# Altium PCB PowerPCB.PcbDoc
Units mm, origin at the board's own origin, x right, y up, seen from the top; angles counter-clockwise.
Board outline 68.75 x 53 mm, 2 copper layers (Top Layer, Bottom Layer); 12 components, 8 nets, 26 pads, 0 vias.
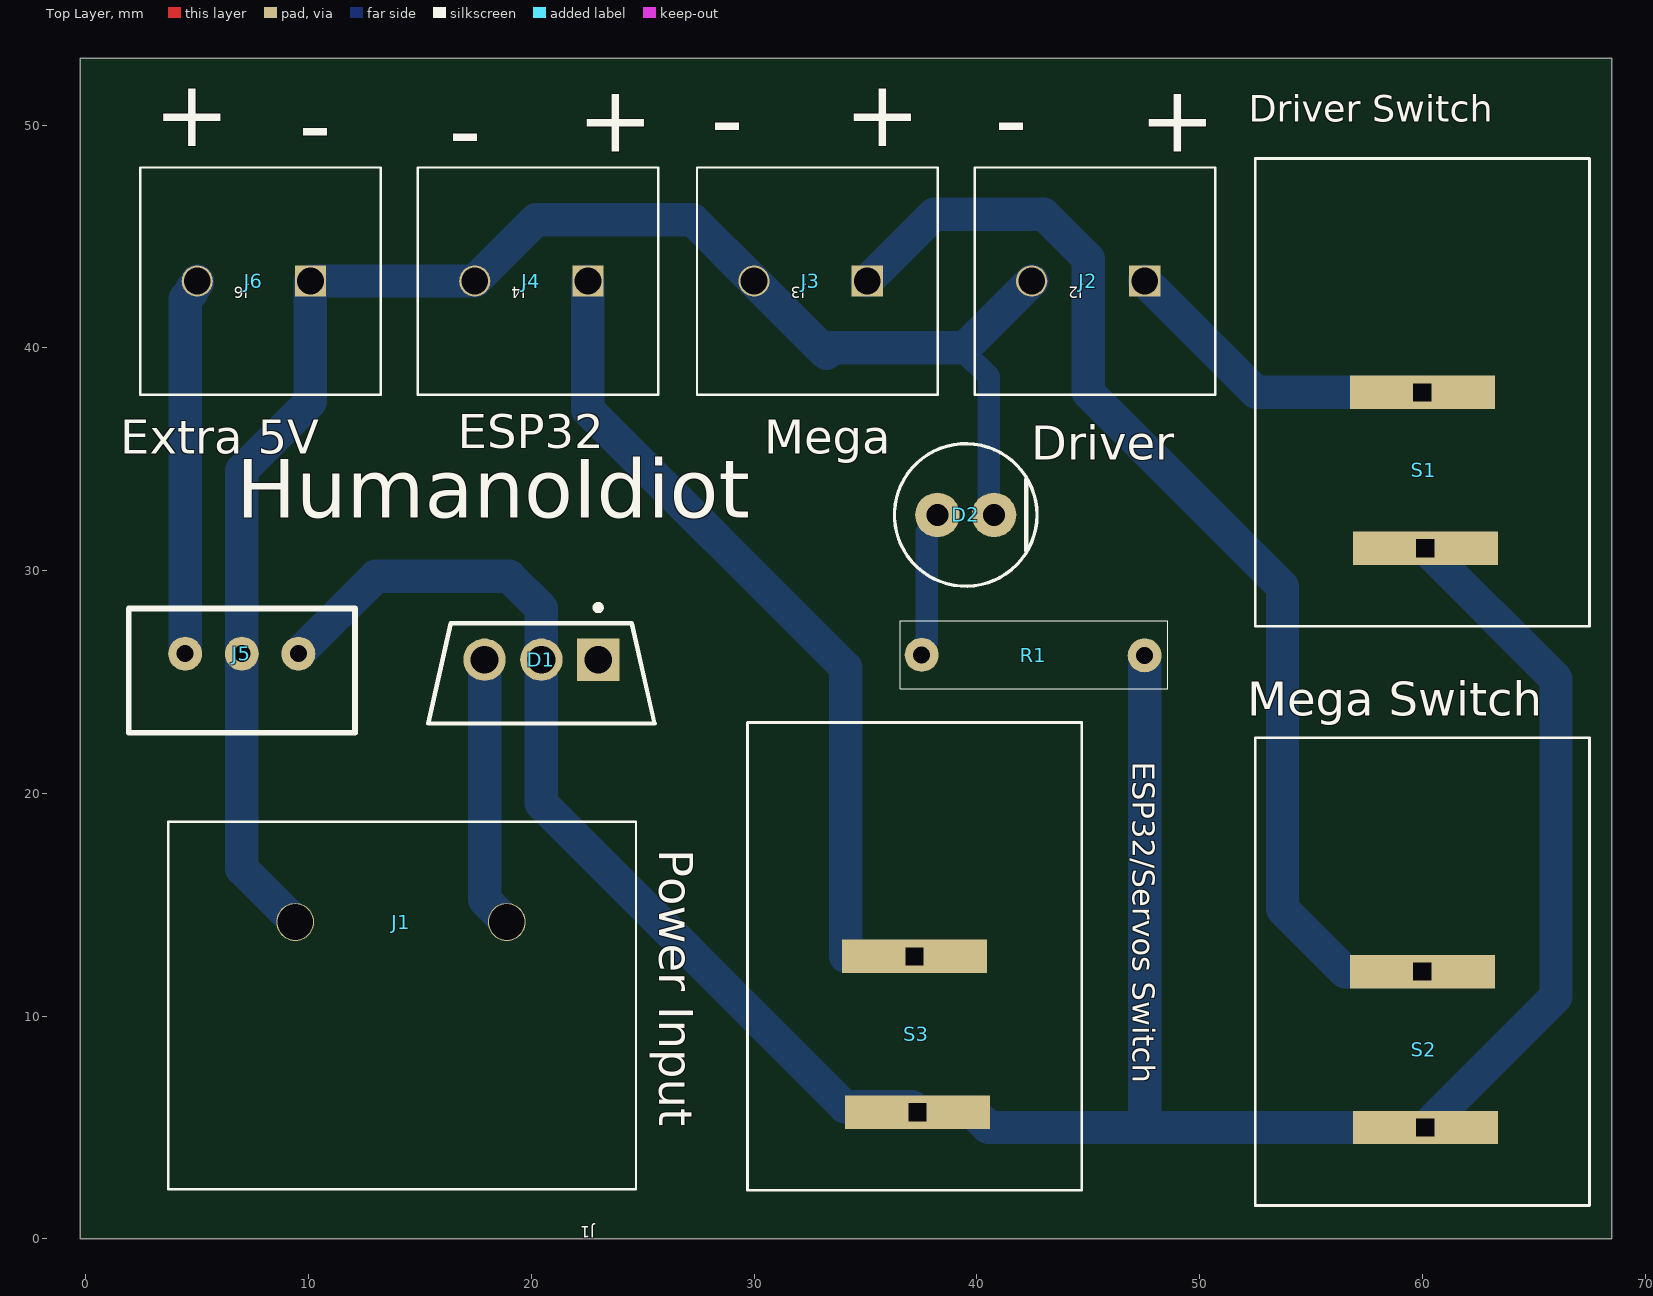
[diagram p0: Top Layer view]
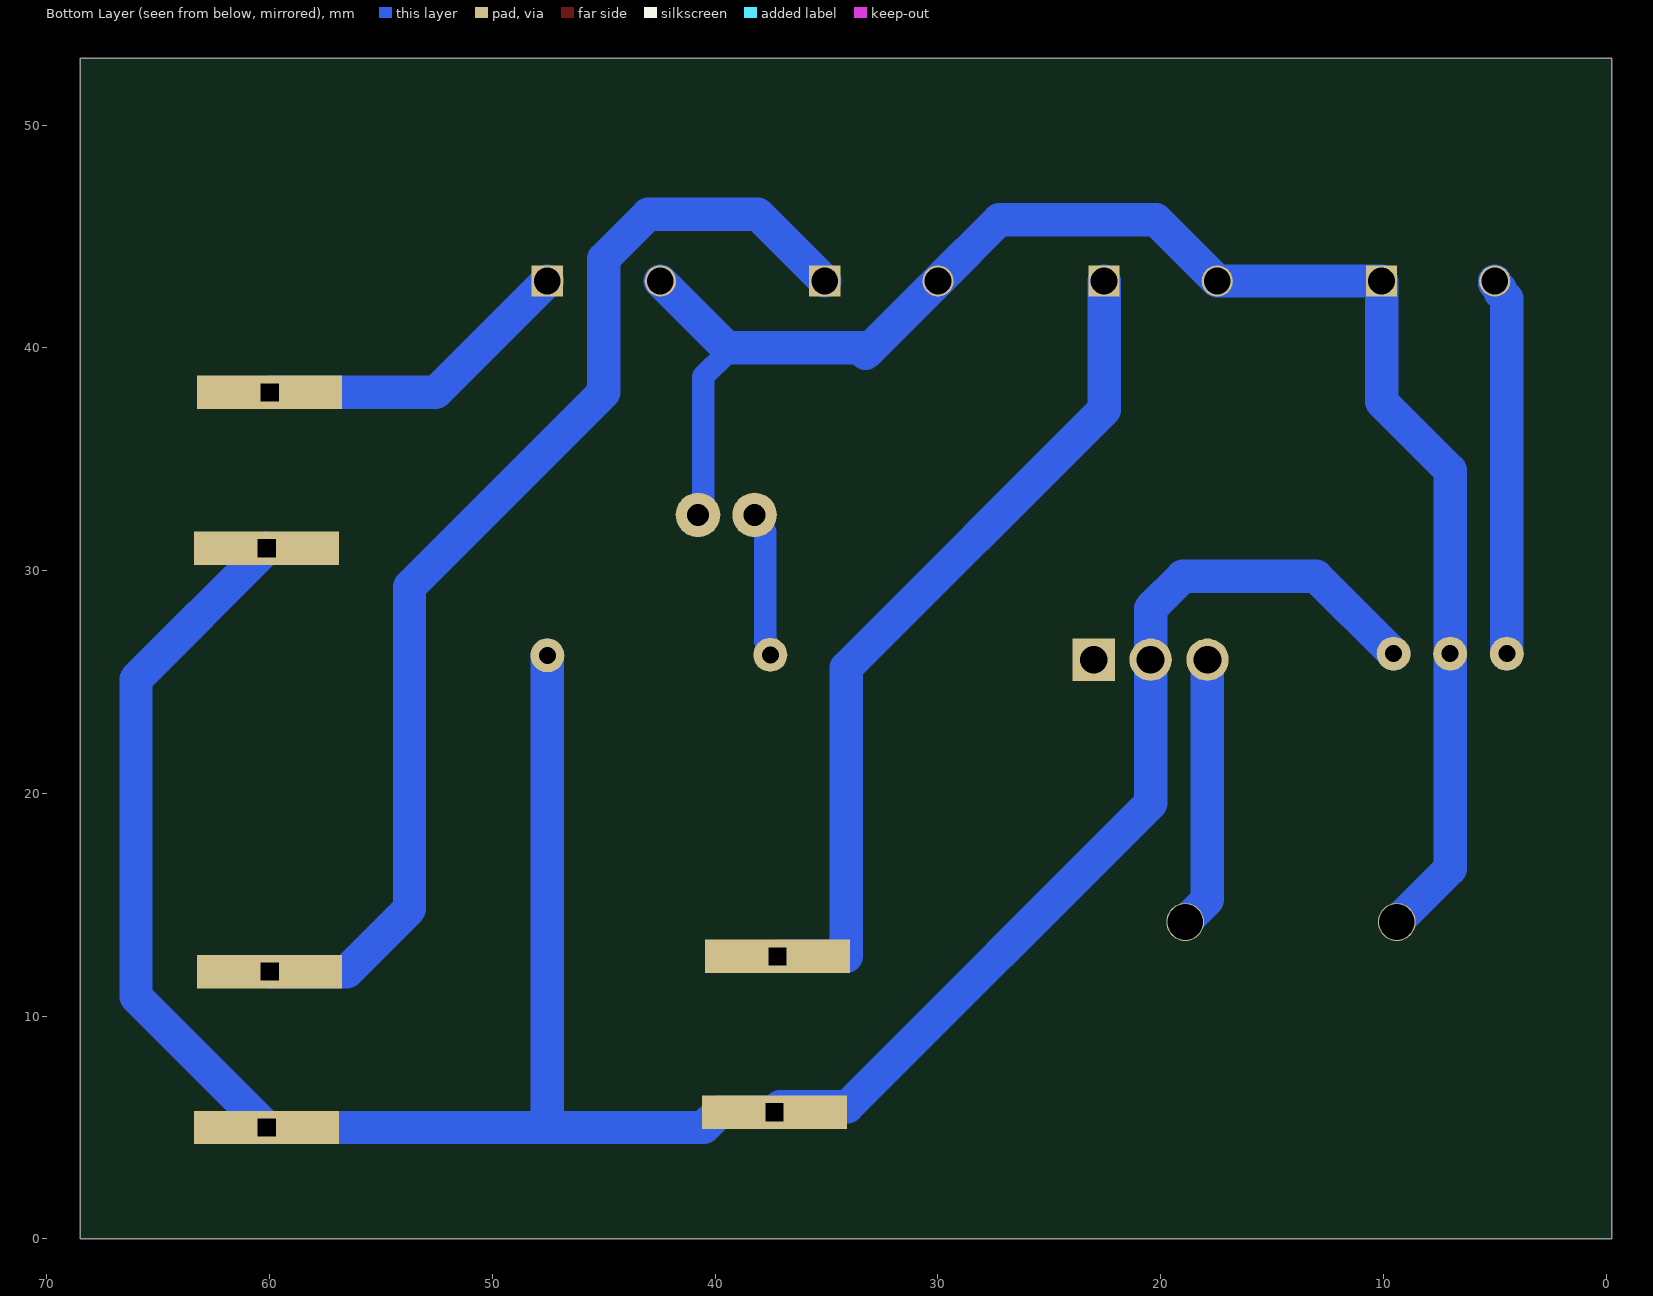
[diagram p1: Bottom Layer view, seen from below]
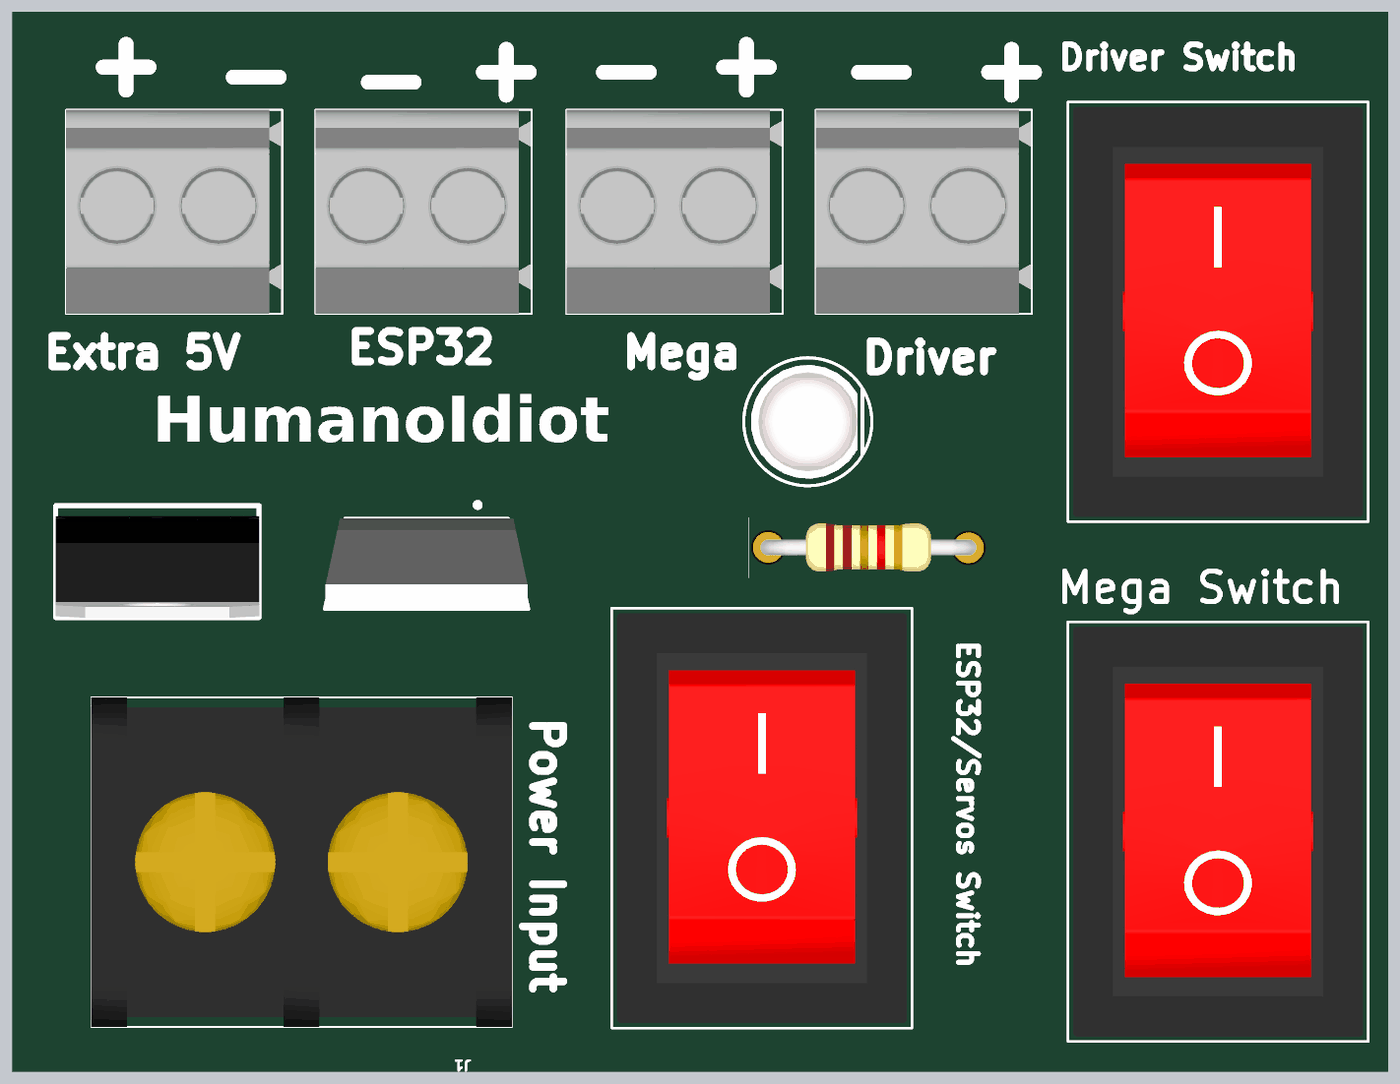
[diagram p2: 3D render of the assembled board from above, using the file's embedded part models]

## Layer stack, top to bottom
Top Solder: solder mask 0.0102, Solder Resist, Dk 3.5
Top Layer: signal copper 0.0356
Dielectric 1: dielectric 0.32, FR-4, Dk 4.8
Bottom Layer: signal copper 0.0356
Bottom Solder: solder mask 0.0102, Solder Resist, Dk 3.5

## Board outline
-0.25,0 -0.25,53 68.5,53 68.5,0

## Design rules (kind name [scope] priority, off if disabled: settings)
Clearance [All] p1: gap=0.254 ignorepadtopadclearanceinfootprint=FALSE
PolygonConnect [All] p1: connectstyle=Relief reliefconductorwidth=0.254 reliefentries=4 polygonreliefangle="90 Angle" airgapwidth=0.254
RoutingLayers [All] p1: top layer_v5=FALSE bottom layer_v5=TRUE
RoutingVias [All] p1: holewidth=0.711 width=1.27 viastyle="Through Hole" minholewidth=0.711 minwidth=1.27 maxholewidth=0.711 maxwidth=1.27
SolderMaskExpansion [All] p1: expansion=0.102 istentingtop=FALSE
Width [All] p1: maxlimit=1.5 minlimit=0.254 preferedwidth=1 minimp=50.000000 maximp=50.000000 favimp=50.000000
29 further rules are at their usual default settings.

## Components (designator, comment, footprint, x,y, rotation, side; value= is the part's Value field where it differs from the comment)
D1 "MBR20100CT-E3/4W" FP-MBR20100CT-E3-4W-MFG 20.45,25.39 r270 top
D2 "SFH 4550" FP-SFH_4550-MFG 39.5,32.5 r180 top
J1 "Power Input" "Barrier Terminal 2P" 18.898,14.224 r180 top
J2 "Driver" "Screw Terminal 2 pins" 45,43 r180 top
J3 "Mega" "Screw Terminal 2 pins" 32.54,43 r180 top
J4 "ESP32" "Screw Terminal 2 pins" 20,43 r180 top
J5 "7805_hole" 780X_hole 7,25 r180 top
J6 "Extra 5V" "Screw Terminal 2 pins" 7.54,43 r180 top
R1 "0.25W_resistor" 0.25W_resistor 40.75,25 r0 top
S1 "Driver Switch" ON/OFF_Switch_17*11 67.5,28.75 r90 top
S2 "Mega Switch" ON/OFF_Switch_17*11 67.5,2.75 r90 top
S3 "ESP32/Servos Switch" ON/OFF_Switch_17*11 44.704,3.429 r90 top

## Footprints (in the part's own frame and the unit in brackets; to place one, negate y for a bottom-side part, rotate by r counter-clockwise, add the part's x,y. Pads: shape width x height; smd on the part's side, far side on the other; paste and mask are expansions set on the pad)
0.25W_resistor [mil]
  round 60 hole 30: 1(-127,48) 2(267,47)
  silkscreen extent -165,-12 308,108, body extent -143,1 283,95, height 162
780X_hole [mil]
  round 60 hole 30: 1(-100,-50) 2(100,-50) 3(0,-50)
  silkscreen extent -200,-130 200,90, body extent -201,-130 201,91, height 813
"Barrier Terminal 2P" [mm]
  round 1.7 hole 1.6 mask+0.2: 1(0,0) 2(9.5,0)
  silkscreen extent -5.8,-4.5 15.2,12, body extent -5.82,-4.5 15.23,12, height 18.5
FP-MBR20100CT-E3-4W-MFG [mm]
  rect 1.9x1.9 hole 1.25 paste-2539.97 mask+0: 1(-0.61,2.55)
  round 1.9 hole 1.25 paste-2539.97 mask+0: 2(-0.61,0) 3(-0.61,-2.55)
  silkscreen extent -3.07,-5.08 2.25,5.08, body extent -2.45,-5.37 2.45,5.37, height 0.25
FP-SFH_4550-MFG [mm]
  round 2 hole 1 paste-2539.97 mask+0: 1(-1.27,0) 2(1.27,0)
  silkscreen extent -3.2,-3.2 3.2,3.2, body extent -3.05,-3.05 3.05,3.05, height 0.25
ON/OFF_Switch_17*11 [mm] "ON/OFF_Switch_17*11"
  rect 1.5x6.5 hole 0.8 square: 1(2.25,7.366) 2(9.25,7.5)
  silkscreen extent -1.25,0 19.75,15, body extent -1,0.25 19.5,14.75, height 18.22
"Screw Terminal 2 pins" [mm]
  rect 1.4x1.4 hole 1.2 mask+0.102: 1(-2.54,0)
  round 1.4 hole 1.2 mask+0.102: 2(2.54,0)
  silkscreen extent -5.7,-5.1 5.1,5.1, body extent -5.66,-5.1 5.1,5.1, height 14.1

## Part data
D1: library part CMP-00030-42878425-1, "MBR20100CT-E3/4W Dual Common-Cathode High-Voltage Schottky Rectifier", Average Rectified Current=10A, Case/Package=TO-220AB, Forward Current=20A, Forward Voltage=800mV, Max Forward Surge Current (Ifsm)=150A, Max Junction Temperature (Tj)=150°C, Max Repetitive Reverse Voltage (Vrrm)=100V, Max Reverse Leakage Current=100µA, Min Operating Temperature=-65°C, Element Configuration="Common Cathode", Height=15.3162mm, Lead Free="Lead Free", Length=10.5156mm, Max Operating Temperature=150°C, Max Reverse Voltage (DC)=100V, Max Surge Current=150A, Mount="Through Hole", NexarPartId=42878425, Number of Pins=3, Peak Non-Repetitive Surge Current=150A, Peak Reverse Current=100µA, Radiation Hardening=No, Reverse Voltage=100V, RoHS=Compliant, Schedule B="8541100080, 8541100080", Width=4.699mm
D2: library part CMP-62016-000011-1, "EMITTER IR 860NM 100MA RADIAL", Colour=Infrared, Forward Current=100mA, Forward Voltage=1.5V, Manufacturer="Osram Opto", Reverse Voltage=5V, Temperature="-40°C to +100°C", Temperature Range High=+100°C, Temperature Range Low=-40°C, Automotive=No, Category=Diode, ComponentLink2Description=Datasheet, ComponentLink2URL=https://dammedia.osram.info/media/resource/hires/osram-dam-5580407/SFH%204550_EN.pdf, Device Class L1=Optoelectronics, Device Class L2=LEDs, Device Class L3=unset, Digikey Description="EMITTER IR 860NM 100MA RADIAL", Lead Free=Yes, Led Orientation=Straight, Manufacturer Part Number="SFH 4550", Mouser Description="Infrared Emitters - High Power Infrared 850 nm HALF ANGLE +/-3DEG", Octopart=https://octopart.com/sfh+4550-osram+opto-55410894, Package="SFH 4550", Peak Emmision Wavelength=860nm, RoHS=TRUE, Viewing Angle=6°
J1: library part "Barrier Terminal 2P", Manufacturer=DORABO, Manufacturer Part #="DBT50G-9.5-2P-BK-P OGC", Seller="Makers Electronics", Seller Part #=3496300101634
J2 J3 J4 J6: library part "Screw Terminal 2 pins", "Brass Alloy 1x2P 16A -40℃~+105℃ 300V Blue Tin 12~24 Direct Insert 5.08mm 1 2 Plugin,P=5.08mm Screw Terminal Blocks ROHS", Manufacturer=CUI, Manufacturer Part Number=TB004-508-02BE, Supplier Part Number=C3818636, Supplier="LSCS ELECTRONICS"
S1 S2 S3: library part ON/OFF_Switch_17*11

## Nets (pads, with @x,y where several pads share a name; then routed paths per layer and width w, separated by ;. In a path a pad name is that pad's centre, name@x,y a point inside that pad or via, vN(x,y) a via of type N, cw(c..) or ccw(c..) an arc to the next point about the centre after c; other vN are vias at no path point)
5V: J5.2 J6.2 | length 17
  Bottom Layer w1.5: J5.2 4.46,42.214 4.75,42.504 4.75,42.642 5,42.892 J6.2
+12V: D1.2 J5.1 R1.2 S1.1 S2.1 S3.1 | length 119.6
  Bottom Layer w0.381: 47.532,5.218 47.75,5
  Bottom Layer w1.5: J5.1 13.02,29.75 19,29.75 20.45,28.3 D1.2 20.45,19.55 34.071,5.929 37.088,5.929 S3.1 39.838,5.679 40.517,5 S2.1 66,10.866 66,25.134 S1.1 ; 47.532,5.218 R1.2
GND: D2.1 J1.2 J2.2 J3.2 J4.2 J5.3 J6.1 | length 82.9
  Bottom Layer w1: 33.25,39.75 39.497,39.75 40.539,38.708 40.539,32.404 40.77,32.404 D2.1
  Bottom Layer w1.5: J1.2 7,16.622 J5.3 7,34.5 10.08,37.58 J6.1 J4.2 20.21,45.75 27.25,45.75 J3.2 33,40 ; 33.25,39.75 33,40 ; J2.2 39.46,40 33,40
IN: D1.3 J1.1 | length 12.2
  Bottom Layer w1.5: D1.3 17.9,15.222 J1.1
NetD2_2: D2.2 R1.1 | length 6.6
  Bottom Layer w1: R1.1 37.624,26.319 37.624,26.69 37.75,26.815 37.75,31.749 38.23,32.229 D2.2
NetJ2_1: J2.1 S1.2 | length 14.5
  Bottom Layer w1.5: J2.1 52.54,38 S1.2
NetJ3_1: J3.1 S2.2 | length 52.2
  Bottom Layer w1.5: J3.1 38.08,46 43,46 45,44 45,38 53.721,29.279 53.721,14.808 56.529,12 S2.2
NetJ4_1: J4.1 S3.2 | length 38.2
  Bottom Layer w1.5: J4.1 22.54,37.21 34.112,25.638 34.112,12.679 S3.2
pads on no net: D1.1

## Silkscreen, mask and mechanical layers (free items; w line width, h text height)
Top Overlay:
  text "+" at 3.05,49.05 h3
  text "+" at 34.05,49.05 h3
  text "+" at 22.05,48.8 h3
  text "-" at 28.05,48.8 h3
  text "-" at 40.8,48.8 h3
  text "+" at 47.3,48.8 h3
  text "-" at 9.55,48.55 h3
  text "-" at 16.3,48.3 h3
  text "HumanoIdiot" at 6.75,31.5 h4.5
Bottom Courtyard:
  the board outline again, w0.254